# Altium PCB B220.PcbDoc
Units mm, origin at the board's own origin, x right, y up, seen from the top; angles counter-clockwise.
Board outline 40 x 22 mm, 4 copper layers (Top Copper, Signal Layer 1, Signal Layer 2, Bottom Copper), stack 1.57 mm thick; 17 components, 21 nets, 92 pads, 298 vias.
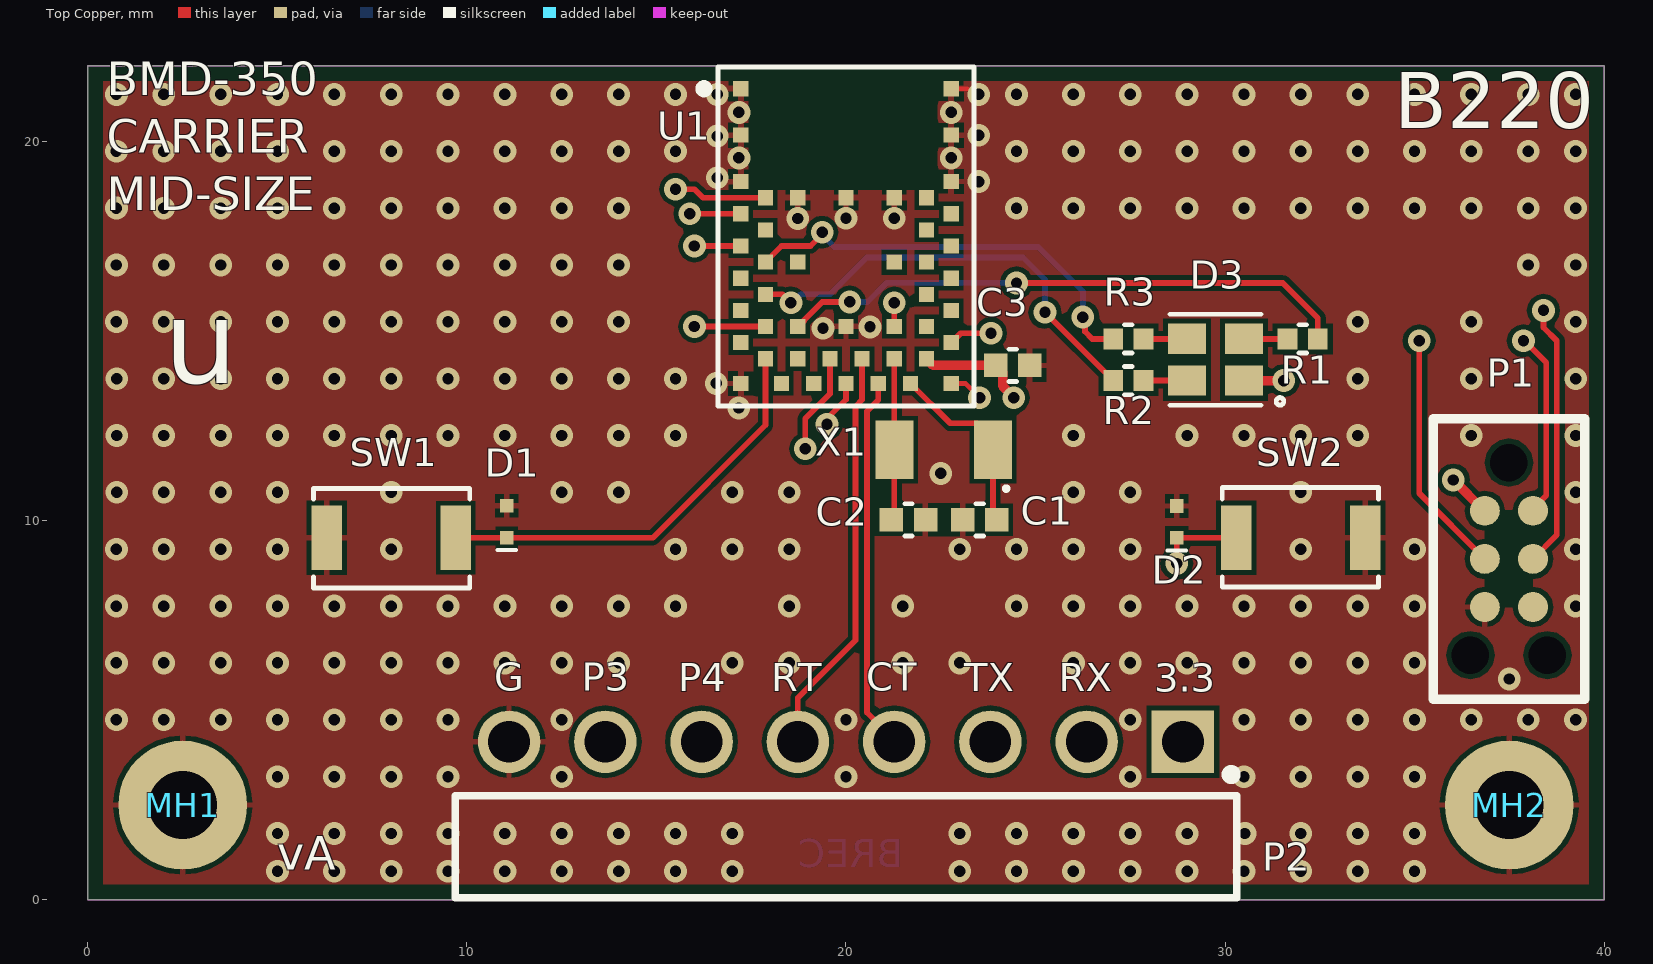
[diagram p0: Top Copper view]
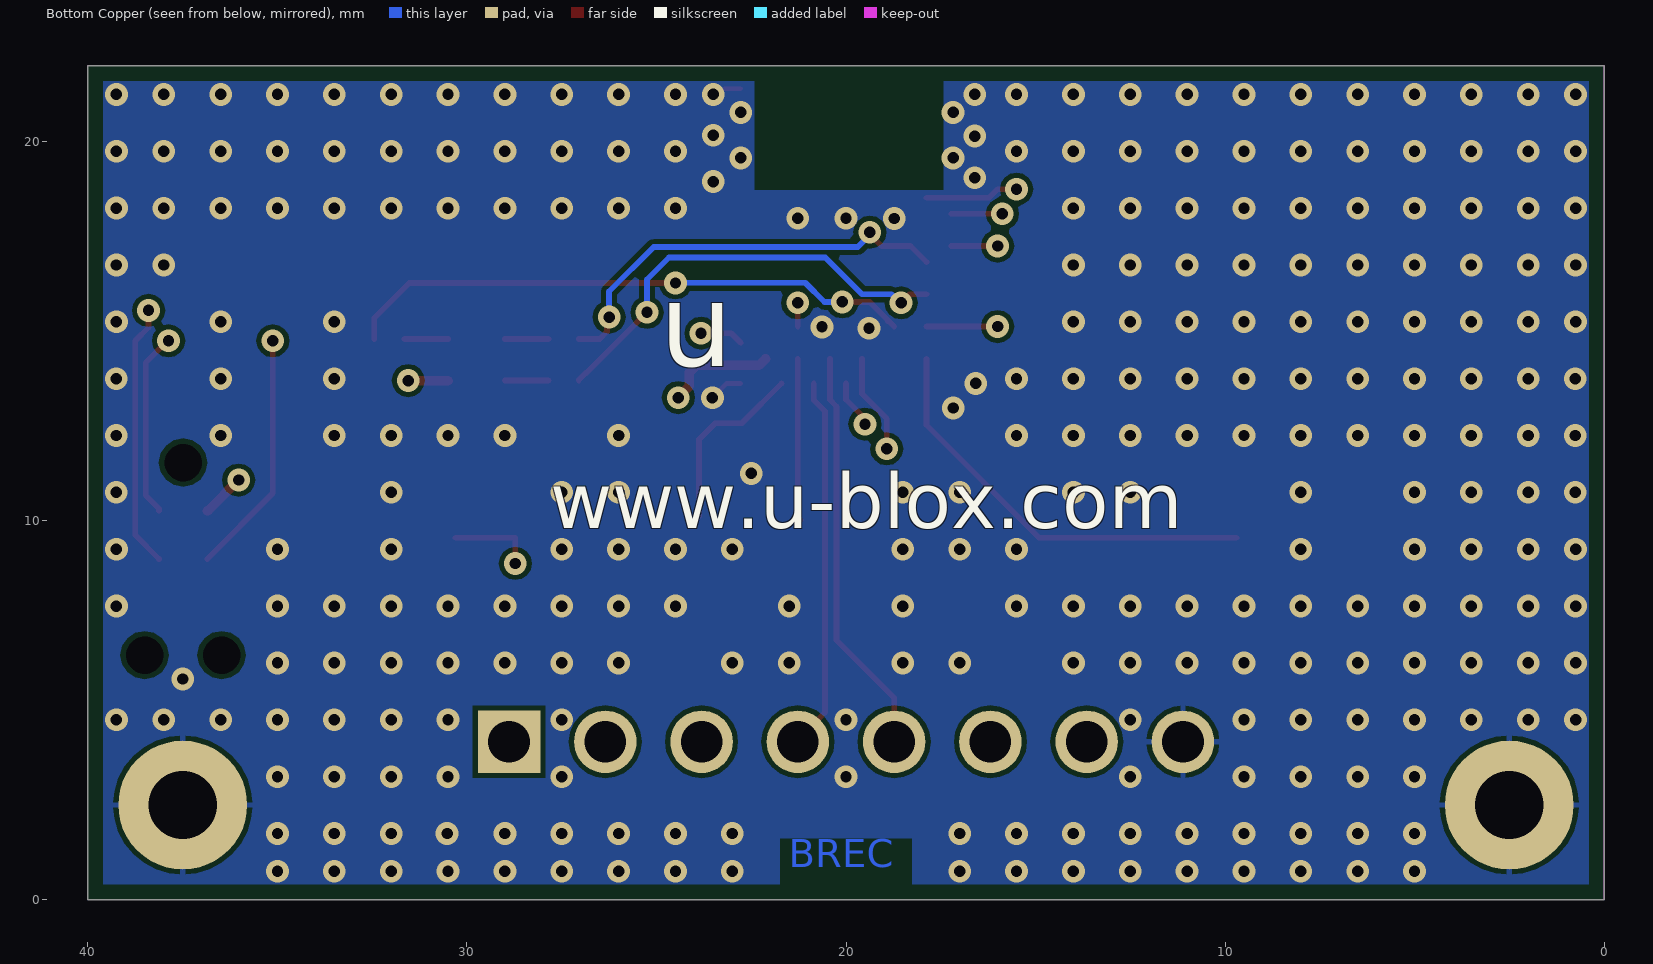
[diagram p1: Bottom Copper view, seen from below]
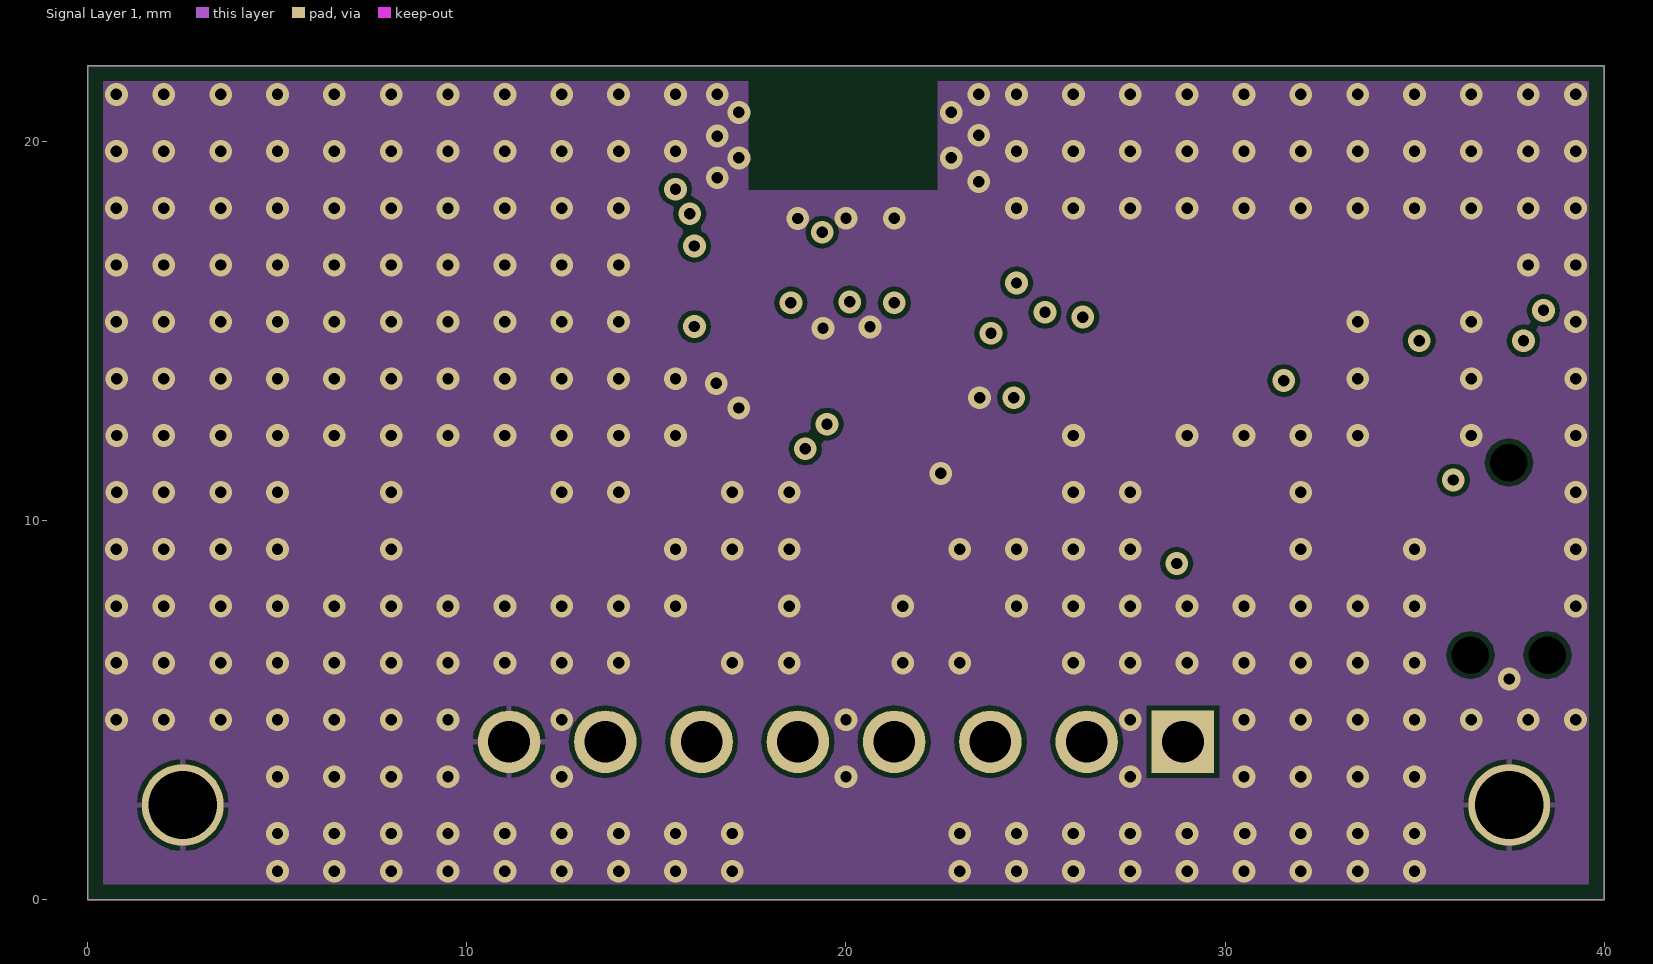
[diagram p2: Signal Layer 1]
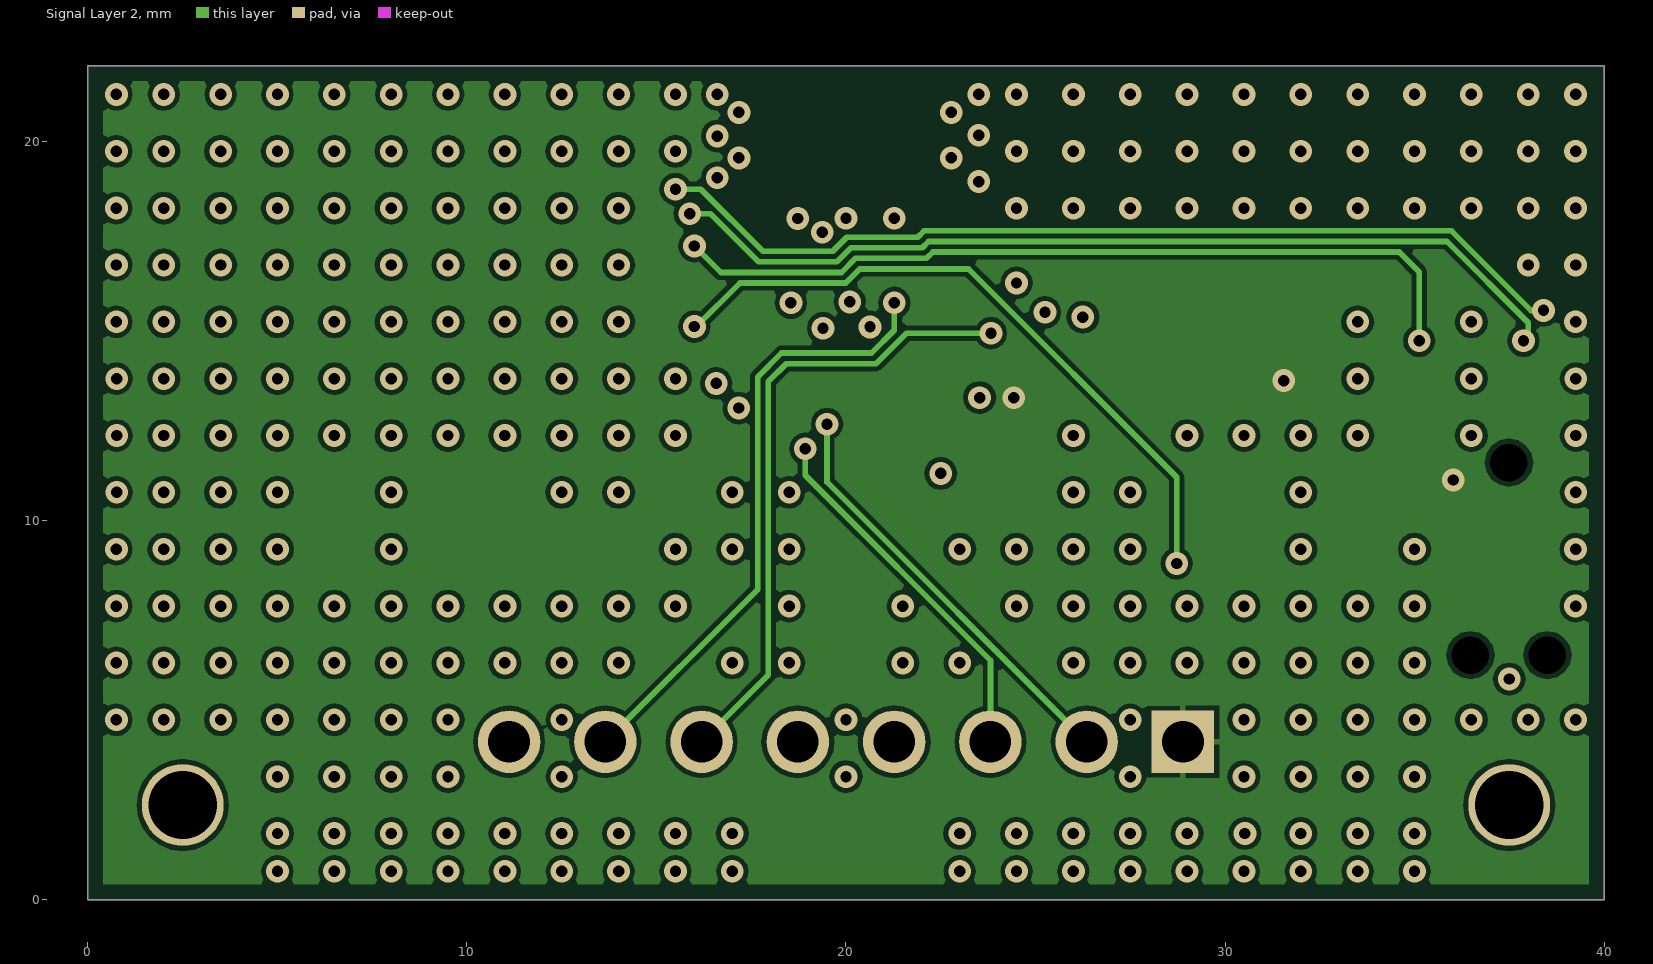
[diagram p3: Signal Layer 2]

## Layer stack, top to bottom
Top Mask: solder mask 0.015, Solder Resist, Dk 3.8
Top Copper: signal copper 0.035
Dielectric 1: prepreg 0.1, 2313, Dk 4.05
Signal Layer 1: signal copper 0.0175
Core: core 1.265, FR-4, Dk 4.5
Signal Layer 2: signal copper 0.0175
Dielectric 2: prepreg 0.1, 2313, Dk 4.05
Bottom Copper: signal copper 0.035
Bottom Mask: solder mask 0.015, Solder Resist, Dk 3.8

## Board outline
0,22 40,22 40,0 0,0

## Design rules (kind name [scope] priority, off if disabled: settings)
BoardOutlineClearance [All] p1: gap=0.4 ignorepadtopadclearanceinfootprint=FALSE
Clearance "Stitching GND" [IsStitchingVia and InNet('GND') vs (IsVia and (Not IsStitchingVia)) Or IsPad] p1: gap=0.127 ignorepadtopadclearanceinfootprint=TRUE
Clearance Clearance_Poly [InPolygon vs OnLayer('Keep-Out Layer') OR (OnLayer('Multi-Layer') AND IsPad  AND Not(PadIsPlated))] p2: gap=0.127 ignorepadtopadclearanceinfootprint=TRUE
Clearance [All] p3: gap=0.127 ignorepadtopadclearanceinfootprint=FALSE except(0: Arc-Text Arc-Hole Track-Text Track-Hole SMDPad-Text SMDPad-Hole THPad-Text THPad-Hole Via-Text Via-Hole Fill-Text Fill-Hole Poly-Text Poly-Hole Region-Text Region-Hole Text-Text Text-Hole)
ComponentClearance [All] p1: gap=0.127 collisioncheckmode=3 verticalgap=0.254 showdistances=FALSE
DiffPairsRouting .14 [All] p1: maxlimit=0.254 minlimit=0.1 mostfreqgap=0.254 toplayer_maxgap=0.1 toplayer_prefgap=0.1 toplayer_minwidth=0.1 toplayer_maxwidth=0.1 toplayer_prefwidth=0.1 midlayer1_mingap=0.254 midlayer1_minwidth=0.381 midlayer1_maxwidth=0.381 midlayer1_prefwidth=0.381 midlayer2_mingap=0.254 midlayer2_minwidth=0.381 midlayer2_maxwidth=0.381 midlayer2_prefwidth=0.381 bottomlayer_maxgap=0.1 bottomlayer_prefgap=0.1 bottomlayer_minwidth=0.1 bottomlayer_maxwidth=0.1 bottomlayer_prefwidth=0.1 maxuncoupledlength=12.7
Height [All] p1: minheight=0 maxheight=25.4 prefheight=2.54
HoleSize [All] p1: absolutevalues=TRUE maxlimit=2540 minlimit=0.127 maxpercent=80.000 minpercent=20.000
HoleToHoleClearance [All] p1: gap=0.152 allowstackedmicrovias=TRUE
MinimumSolderMaskSliver [All] p1: minsoldermaskwidth=0.025
PlaneClearance [InPoly] p1: clearance=0.254
PlaneConnect [All] p1: pad.planeconnectstyle=Relief pad.reliefexpansion=0.508 pad.reliefentries=4 pad.reliefconductorwidth=0.254 pad.reliefairgap=0.254 via.planeconnectstyle=Direct via.reliefexpansion=0.508 via.reliefentries=4 via.reliefconductorwidth=0.254 via.reliefairgap=0.254
PolygonConnect ThermalVias [IsVia] p1: connectstyle=Direct reliefconductorwidth=0.254 reliefentries=4 polygonreliefangle="90 Angle" airgapwidth=0.254
PolygonConnect "PolygonConnect - Power" [InNetClass('')] p2: connectstyle=Relief reliefconductorwidth=0.254 reliefentries=4 polygonreliefangle="90 Angle" airgapwidth=0.127
PolygonConnect PolygonConnect-BGA [InComponentClass('')] p3: connectstyle=Relief reliefconductorwidth=0.152 reliefentries=4 polygonreliefangle="45 Angle" airgapwidth=0.152
PolygonConnect PolygonConnect-General [All] p4: connectstyle=Relief reliefconductorwidth=0.152 reliefentries=4 polygonreliefangle="90 Angle" airgapwidth=0.127
RoutingLayers [All] p1: top layer_v5=TRUE mid layer 1_v5=FALSE mid layer 2_v5=TRUE bottom layer_v5=TRUE
RoutingVias [All] p1: holewidth=0.3 width=0.6 viastyle="Through Hole" minholewidth=0.2 minwidth=0.5 maxholewidth=7 maxwidth=1
SMDEntry [All] p1 off: side=TRUE corner=TRUE anyangle=TRUE
SilkToBoardRegionClearance [All] p1 off:
SilkToSilkClearance [All] p1 off: silktosilkclearance=0.025
SilkToSolderMaskClearance [IsPad] p1 off: minsilkscreentomaskgap=0 clearancetoexposedcopper=TRUE
SolderMaskExpansion SolderMaskExpansion_via [IsVia] p1: expansion=-0.254 istentingtop=TRUE
SolderMaskExpansion [All] p2: expansion=0.05 istentingtop=FALSE
UnRoutedNet [All] p1: checkbadconnections=TRUE
ViasUnderSMD [All] p1: allowed=FALSE
Width [All] p1: maxlimit=2.54 minlimit=0.127 preferedwidth=0.152 toplayer_maxwidth=0.254 toplayer_prefwidth=0.152 bottomlayer_maxwidth=0.254 bottomlayer_prefwidth=0.152 minimp=50.000000 maximp=50.000000 favimp=50.000000
Width Width_1 [All] p2: maxlimit=0.254 minlimit=0.254 preferedwidth=0.254
17 further rules are at their usual default settings.

## Components (designator, comment, footprint, x,y, rotation, side; value= is the part's Value field where it differs from the comment)
C1 "UBXH01-000411410P" "Cap 0402" 23.525,10.025 r180 top value=10P
C2 "UBXH01-000411410P" "Cap 0402" 21.65,10.025 r0 top value=10P
C3 "UBXH01-2021002100N" "Cap 0402" 24.4,14.1 r0 top value=100N
D1 "110-00019" SOD-923 11.05,9.975 r90 top
D2 "110-00019" SOD-923 28.725,9.97 r90 top
D3 "115-00011" 4-PLCC 29.75,14.25 r0 top
MH1 "MH_M1.5DNP" MH_M1.5 2.5,2.5 r0 top
MH2 "MH_M1.5DNP" MH_M1.5 37.5,2.5 r0 top
P1 "TC2030-IDC-NLDNP" TC2030-IDC-NL 37.49,11.535 r270 top
P2 "61300811021" 61300811021 20,1.4 r0 top
R1 "180-00031499R" "RES 0402 HD" 32.05,14.8 r180 top value=499R
R2 "180-00098220R" "RES 0402 HD" 27.45,13.7 r0 top value=220R
R3 "180-00098220R" "RES 0402 HD" 27.45,14.8 r0 top value=220R
SW1 "135-00007" B3U-1000P 8,9.55 r180 top
SW2 "135-00007" B3U-1000P 32,9.55 r0 top
U1 "=Value" BMD_LGA47S_865X640X150_CHIP 20,17.525 r0 top
X1 "100-00005" XTAL_3215 22.575,11.875 r180 top

## Footprints (in the part's own frame and the unit in brackets; to place one, negate y for a bottom-side part, rotate by r counter-clockwise, add the part's x,y. Pads: shape width x height; smd on the part's side, far side on the other; paste and mask are expansions set on the pad)
4-PLCC [mm] "4 Pin Plastic Leaded Chip Carrier, 2mm x 2mm"
  rect 1x0.8 smd: 1(0.75,-0.55) 2(-0.75,-0.55) 3(-0.75,0.55) 4(0.75,0.55)
  silkscreen extent -1.2,-1.2 1.8,1.2, body extent -1.05,-1.05 1.05,1.05, height 1.01
61300811021 [mm]
  rect 1.65x1.65 hole 1.1: 1(8.89,2.77)
  round 1.65 hole 1.1: 2(6.35,2.77) 3(3.81,2.77) 4(1.27,2.77) 5(-1.27,2.77) 6(-3.81,2.77) 7(-6.35,2.77) 8(-8.89,2.77)
  silkscreen extent -10.31,-1.35 10.31,2.03, body extent -10.16,-7.27 10.16,3.09, height 2.58
B3U-1000P [mm] "Button Tactile, SMT 4mm x 2.5mm, height 1.2mm"
  rect 0.8x1.7 smd: 1(-1.7,0) 2(1.7,0)
  silkscreen extent -2.07,-1.3 2.05,1.33, body extent -2,-1.25 2,1.25, height 1.6
BMD_LGA47S_865X640X150_CHIP [mm] "LGA, 47pin, 0.8mm Pitch, 8.65mm x 6.4mm"
  rect 0.4x0.4 smd: 1(-2.775,3.875) 2(-2.775,2.65) 3(-2.775,1.425) 4(-2.125,1) 5(-2.775,0.575) 6(-2.125,0.15) 7(-2.775,-0.275) 8(-2.125,-0.7) 9(-2.775,-1.125) 10(-2.125,-1.55) 11(-2.775,-1.975) 12(-2.125,-2.4) 13(-2.775,-2.825) 14(-2.125,-3.25) 15(-2.775,-3.9) 16(-1.7,-3.9) 17(-1.275,-3.25) 18(-0.85,-3.9) 19(-0.425,-3.25) 20(0,-3.9) 21(0.425,-3.25) 22(0.85,-3.9) 23(1.275,-3.25) 24(1.7,-3.9) 25(2.125,-3.25) 26(2.775,-3.9) 27(2.775,-2.825) 28(2.125,-2.4) 29(2.775,-1.975) 30(2.125,-1.55) 31(2.775,-1.125) 32(2.125,-0.7) 33(2.775,-0.275) 34(2.125,0.15) 35(2.775,0.575) 36(2.125,1) 37(2.775,1.425) 38(2.775,2.65) 39(2.775,3.875) 40(-1.275,1) 41(-1.275,-0.7) 42(-1.275,-2.4) 43(0,-2.4) 44(1.275,-2.4) 45(1.275,-0.7) 46(1.275,1) 47(0,1)
  Multi-Layer pour cut-out: -3.2,4.325 -3.2,4.075 -2.575,4.075 -2.575,1.2 2.425,1.2 2.425,4.075 3.2,4.075 3.2,4.325
  silkscreen extent -3.85,-4.5 3.37,4.45, body extent -3.2,-4.32 3.2,4.33, height 1.54
"Cap 0402" [mm] "Chip Capacitor, 2-Leads, Body 1.00x0.50mm, IPC Medium Density"
  rect 0.62x0.62 smd: 1(-0.45,0) 2(0.45,0)
  silkscreen extent -0.1,-0.43 0.1,0.43, body extent -0.55,-0.3 0.55,0.3, height 0.6
MH_M1.5 [mm] "Mounting Hole M1.5 Metric, 3.4mm diameter pad"
  round 3.4 / inner round 2.159 / far side round 3.4 hole 1.8: 1(0,0)
"RES 0402 HD" [mm] "Chip Resistor, 2-Leads, Body 1.05x0.54mm, IPC High Density"
  rect 0.52x0.55 smd: 1(-0.4,0) 2(0.4,0)
  silkscreen extent -0.1,-0.38 0.1,0.38, body extent -0.55,-0.3 0.55,0.3, height 0.4
SOD-923 [mm] "SOD-923, 2-Leads, Body 1.25x2.50mm, IPC High Density,"
  rect 0.36x0.35 smd mask+0.05: 1(-0.42,0) 2(0.42,0)
  silkscreen extent -0.75,-0.25 -0.75,0.25, body extent -0.4,-0.3 0.4,0.3, height 0.4
TC2030-IDC-NL [mm] "Tag-Connect 6-Pin No Legs"
  round 0.9 hole 0.995 unplated: 0(0,0) 0(5.08,-1.016) 0(5.08,1.016)
  round 0.79 smd paste-0.39: 1(1.27,-0.635) 2(1.27,0.635) 3(2.54,-0.635) 4(2.54,0.635) 5(3.81,-0.635) 6(3.81,0.635)
  silkscreen extent -1.16,-2 6.24,2
XTAL_3215 [mm] "XTAL, 2-Leads, Body 1.50x3.20mm"
  rect 1x1.55 smd: 1(-1.3,0) 2(1.3,0)
  silkscreen extent -1.7,0.98 -1.6,1.07, body extent -1.65,-0.8 1.65,0.8, height 0.9

## Part data
C1 C2: library part UBXH01-0004114, "CAP CER COG 0402", Manufacturer="Murata Manufacturing Company, Ltd.", Manufacturer 2=None, Manufacturer P/N=GRM1555C1H100CZ01, Max Voltage=25.0V, Tolerance=5%, Automotive=None, Critical=None, Editor=martin.frauchiger, Env=ROHS, Manufacturer 3=None, Manufacturer P/N 2=None, Manufacturer P/N 3=None, Max Current=None, Max Operating Temp=None, Max Power=None, Mfg P/N Datasheet=None, Mfg P/N Datasheet 2=None, Mfg P/N Datasheet 3=None, Mfg P/N Released=Yes, Mfg P/N Released 2=None, Mfg P/N Released 3=None, Mfg P/N Split=0, Mfg P/N Split 2=None, Mfg P/N Split 3=None, Mfg P/N Status=Obsolete, Mfg P/N Status 2=None, Mfg P/N Status 3=None, Min Operating Temp=None, Part Number=UBXH01-0004114, Part Type=Capacitor, Perferred=PREF, Permitted Use="Volume Products", RefDes=C, Release Data="2005-09-01 15:36:53", Released by=martin.frauchiger, Single Source=None, Size=0x0y, UBX Wiki=https://wiki.u-blox.com/bin/view/Operations/PartDetails?index=5225
C3: library part UBXH01-2021002, "CAP CER X5R 0402", Manufacturer="Samsung Electro-Mechanics", Manufacturer 2=None, Manufacturer P/N=CL05A104KP5NNN, Max Voltage=10.0V, Tolerance=10%, Automotive=None, Critical=None, Editor=roland.rust, Env=GREEN, Manufacturer 3=None, Manufacturer P/N 2=None, Manufacturer P/N 3=None, Max Current=None, Max Operating Temp=None, Max Power=None, Mfg P/N Datasheet=https://wiki.u-blox.com/bin/view/Generic/Docs/DocumentSummary?index=28113, Mfg P/N Datasheet 2=None, Mfg P/N Datasheet 3=None, Mfg P/N Released=Yes, Mfg P/N Released 2=None, Mfg P/N Released 3=None, Mfg P/N Split=0, Mfg P/N Split 2=None, Mfg P/N Split 3=None, Mfg P/N Status=Active, Mfg P/N Status 2=None, Mfg P/N Status 3=None, Min Operating Temp=None, Part Number=UBXH01-2021002, Part Type=Capacitor, Perferred=PREF, Permitted Use="Volume Products", RefDes=C, Release Data="2005-07-22 13:59:44", Released by=roland.rust, Single Source=None, Size=0x0y, UBX Wiki=https://wiki.u-blox.com/bin/view/Operations/PartDetails?index=5759
D1 D2: "Diode, ESD9B, 3.3V, ST5G, SOD-923", Manufacturer="ON Semiconductor", Manufacturer P/N=ESD9B3.3ST5G, MFG Package=SOD-923, Package Type=SOD, Part Name="Diode TVS 3.3V SOD-923", Voltage=3.3V, Arena Link=https://app.bom.com/a/4M5DJQ9Q9SR7DV4H?v=spec.summary, Body Size="0.8mm x 0.6mm", Component Mounting Type=SMT, Diode Type=TVS, Height=0.4mm, Item_Phase=Production, Part Number=110-00019, Part_Type=Diode, Pins=2, Revision=0A, Supplier 1=Arrow, Supplier Part Number 1=ESD9B3.3ST5G, Use in new designs=Yes
D3: "LED, RGB Diffused SMT, PLCC4 4 Pin", Color=RGB, Current="20mA Red, 10mA Green, 10mA, Blue", Manufacturer="Cree, Inc.", Manufacturer P/N=CLMVB-FKA-CFHEHLCBB7a363, MFG Package=PLCC4, Package Type=Custom, Part Name="LED RGB SMT 2mm x 2mm", Supplier Part Number 1=941-CLMVBFKACFHEHLCB, Voltage=5V, Arena Link=https://app.bom.com/a/UCV39GZGZIHY581D?v=spec.summary, Body Size="2.0mm x 2.0mm", Component Mounting Type=SMT, Height=1mm, Item_Phase=Production, Mounting Type=Vertical, Number of Circuits=3, Part Number=115-00011, Part_Type=LED, Pins=4, Revision=0A, Supplier 1=Mouser, Use in new designs=Yes, Vf="2V Red, 3V Green, 3V Blue"
MH1 MH2: library part MH_M1.5, "1.5M screw mounting hole, plated", Added By="Jeremy D", Added Date=7/9/2015, DNP=DNP, Height=0mm, Part Number=MH_M1.5, Size="3.4mm x 3.4mm", Type="Mounting Hole"
P1: library part TC2030-IDC-NL, "CON PADS FOR CBL PLUG-OF-NAILS 6-PIN NO LEGS", Manufacturer="TAG Connect", Added By="Paul B", Added Date=4/22/2015, DNP=DNP, Height=0, Manufacturer P/N=TC2030-IDC-NL, Part Number=TC2030-IDC-NL, Size="6.731mm x 12.446mm"
P2: library part CMP-1502-01075-1, "THT Angled Pin Header WR-PHD, Pitch 2.54 mm, Single Row, 8 pins", Contact Resistance=20mOhm, Manufacturer="Wurth Electronics", Operating Temperature=-40to105degC, Rated Current=3A, Withstanding Voltage=500VAC, Working Voltage=250VAC, Datasheet URL=https://katalog.we-online.de/em/datasheet/6130xx11021.pdf, Gender=Male, Manufacturer Part Number=61300811021, Manufacturer URL=http://www.we-online.de, Mounting Technology=THT, Orientation=Angled, Package Reference=61300811021, Packaging=Bag, Part Number=61300811021, Pin Number=8, Pitch=2.54mm, Publisher=WurthElektronik, Row Number=Single
R1: library part 180-00031, "Resistor, 499ohm, 1%, 1/16W, 0402", Manufacturer="Rohm Semiconductor", Manufacturer 2="Samsung Electro-Mechanics America, Inc", Manufacturer P/N=MCR01MRTF4990, Manufacturer P/N 2=RC1005F4990CS, Part Name="RES SMD 499 OHM 1% 1/16W 0402", Power=1/16W, Supplier Part Number 1=RHM499CDCT-ND, Tolerance="+/- 1%", Alternate Footprint Ref="RES 0402", Arena Link=https://app.bom.com/a/Q8RZ5CVCVEDU1SS5?v=spec.summary, Component Mounting Type=SMT, Height=0.4mm, Item_Phase=Production, Part Number=180-00031, Part_Type=Resistor, Pins=2, Revision=0D, Size=0402, Supplier 1=Digi-Key, Supplier 2=Digi-Key, Supplier Part Number 2=1276-3992-1-ND, Use in new designs=Yes
R2 R3: library part 180-00098, "Resistor, 220ohm, 5%, 1/16W, 0402.", Manufacturer="Panasonic Electronic Components", Manufacturer 2="Samsung Electro-Mechanics America, Inc", Manufacturer P/N=ERJ-2GEJ221X, Manufacturer P/N 2=RC1005J221CS, Part Name="RES SMD 220 OHM 5% 1/16W 0402", Power=1/16W, Supplier Part Number 1=P220JCT-ND, Tolerance="+/- 5%", Alternate Footprint Ref="RES 0402", Arena Link=https://app.bom.com/a/8Q9HNUDUDWVBJC30?v=spec.summary, Component Mounting Type=SMT, Height=0.4mm, Item_Phase=Production, Part Number=180-00098, Part_Type=Resistor, Pins=2, Revision=0C, Size=0402, Supplier 1=Digi-Key, Supplier 2=Digi-Key, Supplier Part Number 2=1276-4360-1-ND, Use in new designs=Yes
SW1 SW2: "Button, Momentary SPST-NO, 0.05A, 12V, 3mm x 2.5mm", Current=50mA, Manufacturer="Omron Electronics Inc-EMC Div", Manufacturer P/N=B3U-1000P, Part Name="SWITCH TACTILE SPST-NO 0.05A 12V", Supplier Part Number 1=SW1020CT-ND, Voltage=12VDC, Arena Link=https://app.bom.com/a/TBU28FYFYHGV5FQ0?v=spec.summary, Body Size="3mm x 2.5mm", Component Mounting Type=SMT, Height=1.2mm, Item_Phase=Production, Part Number=135-00007, Part_Type=Button, Pins=2, Revision=0A, Supplier 1=Digi-Key, Switch/Button Circuit=SPST, Switch/Button Function=Off-Mom, Use in new designs=Yes
U1: library part BMD-350_alt_symbol, "u-blox BMD-350 Bluetooth 5 module", Manufacturer=u-blox, Manufacturer P/N=BMD-350-A-R, Part Number=BMD-350, Body Size="8.65mm x 6.4mm", Height=1.5mm, Internal Antenna=CHIP, Protocol="BT 5 LE, 2.4GHz Proprietary"
X1: "XTAL, 2Pin, 32.768kHz, 7pF 20ppm", Frequency=32.768kHz, Frequency Tolerance=20ppm, Manufacturer=Epson, Manufacturer 2="AVX Corporation", Manufacturer P/N="FC-135 32.7680KA-AG3", Manufacturer P/N 2=ST3215SB32768C0HPWBB, MFG Package=2-SMD, Part Name="XTAL 32.768kHz 7pF 20ppm 3215", Supplier Part Number 1=SER4086CT-ND, Arena Link=https://app.bom.com/a/L3MU07Q7Q98O5PC8?v=spec.summary, Body Size="3.2mm x 1.5mm", CL=7pF, Component Mounting Type=SMT, Height=0.9mm, Item_Phase=Production, Part Number=100-00005, Part_Type=Crystal/Oscillator, Pins=2, Revision=0C, Supplier 1=Digi-Key, Supplier 2=Digi-Key, Supplier Part Number 2=1253-1113-1-ND, Use in new designs=Yes

## Via types
v1: diameter 0.6, hole 0.3, Top Copper to Bottom Copper, tented both sides, 298 vias

## Nets (pads, with @x,y where several pads share a name; then routed paths per layer and width w, separated by ;. In a path a pad name is that pad's centre, name@x,y a point inside that pad or via, vN(x,y) a via of type N, cw(c..) or ccw(c..) an arc to the next point about the centre after c; other vN are vias at no path point)
3V3: C3.1 D3.1 P1.1 P2.1 U1.25 | length 5.2
  Top Copper w0.254: U1.25 22.3,14.1 C3.1 24.133,13.917 24.133,13.561 24.425,13.269 v1(24.425,13.25) ; D3.1 v1(31.55,13.7) ; v1(36.025,11.075) 36.835,10.265 P1.1
BLUE: R2.1 U1.10 | length 11.6
  Top Copper w0.152: U1.10 18.323,15.975 v1(18.546,15.752) ; v1(25.25,15.5) 26.851,13.899 26.866,13.899 27.05,13.715 R2.1
  Bottom Copper w0.152: v1(18.546,15.752) 18.58,15.752 18.803,15.975 19.575,15.975 20.546,16.946 24.674,16.946 25.25,16.37 v1(25.25,15.5)
BUTTON_1: D1.1 SW1.1 U1.14 | length 11.2
  Top Copper w0.152: SW1.1 9.705,9.555 D1.1 14.905,9.555 17.875,12.525 U1.14
BUTTON_2: D2.1 SW2.1 U1.12 | length 22
  Top Copper w0.152: v1(16,15.125) U1.12 ; v1(28.725,8.875) D2.1 SW2.1
  Signal Layer 2 w0.152: v1(16,15.125) 16.05,15.125 17.2,16.275 19.995,16.275 20.366,16.646 23.229,16.646 28.725,11.15 v1(28.725,8.875)
CTS: P2.4 U1.22 | length 9.9
  Top Copper w0.152: U1.22 20.85,13.188 20.554,12.892 20.554,4.943 21.27,4.227 P2.4
GND: C1.2 C2.2 C3.2 D1.2 D2.2 MH1.1 MH2.1 P1.5 P2.8 SW1.2 SW2.2 U1.1 U1.2 U1.3 U1.15 U1.26 U1.37 U1.38 U1.39 U1.40 U1.43 U1.46 U1.47 | length 1.3
  Top Copper w0.127: U1.26 23.15,13.625 v1(23.525,13.25) ; U1.39 23.2,21.4
  other v1: 5,0.75 6.5,0.75 8,0.75 9.5,0.75 11,0.75 12.5,0.75 14,0.75 15.5,0.75 17,0.75 23,0.75 24.5,0.75 26,0.75 27.5,0.75 29,0.75 30.5,0.75 32,0.75 33.5,0.75 35,0.75 5,1.75 6.5,1.75 8,1.75 9.5,1.75 11,1.75 12.5,1.75 14,1.75 15.5,1.75 17,1.75 23,1.75 24.5,1.75 26,1.75 27.5,1.75 29,1.75 30.525,1.75 32,1.75 33.5,1.75 35,1.75 5,3.25 6.5,3.25 8,3.25 9.5,3.25 12.5,3.25 20,3.25 27.5,3.25 30.5,3.25 32,3.25 33.5,3.25 35,3.25 0.75,4.75 2,4.75 3.5,4.75 5,4.75 6.5,4.75 8,4.75 9.5,4.75 12.5,4.75 20,4.75 27.5,4.75 30.5,4.75 32,4.75 33.5,4.75 35,4.75 36.5,4.75 38,4.75 39.25,4.75 37.5,5.825 0.75,6.25 2,6.25 3.5,6.25 5,6.25 6.5,6.25 8,6.25 9.5,6.25 11,6.25 12.5,6.25 14,6.25 17,6.25 18.5,6.25 21.5,6.25 23,6.25 26,6.25 27.5,6.25 29,6.25 30.5,6.25 32,6.25 33.5,6.25 35,6.25 0.75,7.75 2,7.75 3.5,7.75 5,7.75 6.5,7.75 8,7.75 9.5,7.75 11,7.75 12.5,7.75 14,7.75 15.5,7.75 18.5,7.75 21.5,7.75 24.5,7.75 26,7.75 27.5,7.75 29,7.75 30.5,7.75 32,7.75 33.5,7.75 35,7.75 39.25,7.75 0.75,9.25 2,9.25 3.5,9.25 5,9.25 8,9.25 15.5,9.25 17,9.25 18.5,9.25 23,9.25 24.5,9.25 26,9.25 27.5,9.25 32,9.25 35,9.25 39.25,9.25 0.757,10.75 2,10.75 3.5,10.75 5,10.75 8,10.75 12.5,10.75 14,10.75 17,10.75 18.5,10.75 26,10.75 27.5,10.75 32,10.75 39.257,10.75 22.5,11.25 0.757,12.25 2,12.25 3.5,12.25 5,12.25 6.5,12.25 8,12.25 9.5,12.25 11,12.25 12.5,12.25 14,12.25 15.5,12.25 26,12.25 29,12.25 30.5,12.25 32,12.25 33.5,12.25 36.5,12.25 39.257,12.25 17.168,12.975 16.575,13.625 0.757,13.75 2,13.75 3.5,13.75 5,13.75 6.5,13.75 8,13.75 9.5,13.75 11,13.75 12.5,13.75 14,13.75 15.5,13.75 33.5,13.75 36.5,13.75 39.257,13.75 19.393,15.082 20.634,15.116 0.75,15.25 2,15.25 3.5,15.25 5,15.25 6.5,15.25 8,15.25 9.5,15.25 11,15.25 12.5,15.25 14,15.25 33.5,15.25 36.5,15.25 39.25,15.25 0.75,16.75 2,16.75 3.5,16.75 5,16.75 6.5,16.75 8,16.75 9.5,16.75 11,16.75 12.5,16.75 14,16.75 38,16.75 39.25,16.75 18.725,17.975 19.999,17.986 21.275,17.986 0.75,18.25 2,18.25 3.5,18.25 5,18.25 6.5,18.25 8,18.25 9.5,18.25 11,18.25 12.5,18.25 14,18.25 24.5,18.25 26,18.25 27.5,18.25 29,18.25 30.5,18.25 32,18.25 33.5,18.25 35,18.25 36.5,18.25 38,18.25 39.25,18.25 23.5,18.95 16.6,19.05 17.175,19.575 22.775,19.575 0.75,19.75 2,19.75 3.5,19.75 5,19.75 6.5,19.75 8,19.75 9.5,19.75 11,19.75 12.5,19.75 14,19.75 15.5,19.75 24.5,19.75 26,19.75 27.5,19.75 29,19.75 30.5,19.75 32,19.75 33.5,19.75 35,19.75 36.5,19.75 38,19.75 39.25,19.75 16.6,20.15 23.5,20.175 17.175,20.775 22.775,20.775 0.75,21.25 2,21.25 3.5,21.25 5,21.25 6.5,21.25 8,21.25 9.5,21.25 11,21.25 12.5,21.25 14,21.25 15.5,21.25 16.6,21.25 23.5,21.25 24.5,21.25 26,21.25 27.5,21.25 29,21.25 30.5,21.25 32,21.25 33.5,21.25 35,21.25 36.5,21.25 38,21.25 39.25,21.25
GREEN: R3.1 U1.8 | length 11.3
  Top Copper w0.152: U1.8 18.3,17.25 19.062,17.25 19.371,17.559 v1(19.371,17.615) ; v1(26.25,15.375) 26.309,15.316 26.309,14.991 26.5,14.8 R3.1
  Bottom Copper w0.152: v1(19.371,17.615) 19.377,17.609 19.377,17.536 19.688,17.225 25.075,17.225 26.25,16.05 v1(26.25,15.375)
LFCLK1: C2.1 U1.23 X1.2 | length 4.3
  Top Copper w0.152: C2.1 21.275,10.1 X1.2 U1.23
LFCLK2: C1.1 U1.24 X1.1 | length 5
  Top Copper w0.152: U1.24 22.751,12.574 23.451,12.574 23.875,12.15 X1.1 23.875,10.125 C1.1
NetD3_2: D3.2 R2.2 | length 1.1
  Top Copper w0.152: R2.2 D3.2
NetD3_3: D3.3 R3.2 | length 1.1
  Top Copper w0.152: R3.2 D3.3
NetD3_4: D3.4 R1.2 | length 1.2
  Top Copper w0.152: D3.4 R1.2
nRESET: P1.3 U1.7 | length 29.4
  Top Copper w0.152: v1(16,17.25) U1.7 ; v1(35.125,14.75) 35.125,10.725 P1.3
  Signal Layer 2 w0.152: v1(16,17.25) 16.7,16.55 17.08,16.55 17.084,16.554 19.879,16.554 20.25,16.925 22.125,16.925 22.292,17.092 34.6,17.092 35.125,16.567 v1(35.125,14.75)
P0.03: P2.7 U1.44 | length 16.8
  Top Copper w0.152: U1.44 v1(21.275,15.75)
  Signal Layer 2 w0.152: P2.7 17.671,8.191 17.671,13.796 18.3,14.425 20.675,14.425 21.275,15.025 v1(21.275,15.75)
P0.04: P2.6 U1.27 | length 17.8
  Top Copper w0.152: U1.27 23.025,14.95 v1(23.825,14.95)
  Signal Layer 2 w0.152: P2.6 17.95,5.93 17.95,13.675 18.421,14.146 20.791,14.146 21.595,14.95 v1(23.825,14.95)
RED: R1.1 U1.42 | length 15.1
  Top Copper w0.152: U1.42 18.872,15.272 18.89,15.272 18.89,15.29 19.375,15.775 v1(20.1,15.775) ; v1(24.5,16.275) 31.525,16.275 32.45,15.35 R1.1
  Bottom Copper w0.152: v1(20.1,15.775) 20.568,15.775 21.075,16.282 v1@24.5,16.282
RTS: P2.5 U1.21 | length 10.8
  Top Copper w0.152: P2.5 18.73,5.33 20.25,6.85 20.25,13.017 20.425,13.192 U1.21
RXD: P2.2 U1.20 | length 12.5
  Top Copper w0.152: v1(19.5,12.55) 19.5,12.697 20,13.197 U1.20
  Signal Layer 2 w0.152: v1(19.5,12.55) 19.5,11.02 P2.2
SWCLK: P1.4 U1.4 | length 34.1
  Top Copper w0.152: v1(15.5,18.75) 16,18.75 16.225,18.525 U1.4 ; P1.4 38.754,9.624 38.754,14.75 38.402,15.102 v1(38.402,15.551)
  Signal Layer 2 w0.152: v1(15.5,18.75) 16.17,18.75 17.808,17.112 19.648,17.112 20.019,17.483 21.894,17.483 22.061,17.65 35.975,17.65 38.074,15.551 v1(38.402,15.551)
SWDIO: P1.2 U1.5 | length 30.6
  Top Copper w0.152: v1(15.875,18.1) U1.5 ; v1(37.875,14.75) 37.9,14.75 38.475,14.175 38.475,10.67 38.125,10.32 P1.2
  Signal Layer 2 w0.152: v1(15.875,18.1) 16.425,18.1 17.692,16.833 19.763,16.833 20.134,17.204 22.009,17.204 22.176,17.371 35.859,17.371 38.003,15.228 38.003,14.753 38,14.75 v1(37.875,14.75)
TXD: P2.3 U1.19 | length 12.4
  Top Copper w0.152: v1(18.925,11.9) 18.925,12.7 19.575,13.35 U1.19
  Signal Layer 2 w0.152: v1(18.925,11.9) 18.925,11.2 23.81,6.315 P2.3
pads on no net: P1.0 P1.6 U1.6 U1.9 U1.11 U1.13 U1.16 U1.17 U1.18 U1.28 U1.29 U1.30 U1.31 U1.32 U1.33 U1.34 U1.35 U1.36 U1.41 U1.45

## Polygon pours and split planes (outlines as drawn)
GND on Top Copper "GND_L01_P009" (solid, remove dead copper, pour order 9): 39.999,22 -0.001,22 -0.001,0 39.999,0
GND on Bottom Copper "GND_L04_P010" (solid, remove dead copper, pour order 10): 40,22 0,22 0,0 40,0
GND on Signal Layer 1 "NONET_L-01_P-001" (solid, remove dead copper, pour order 11): 0,22 40,22 40,0 0,0
3V3 on Signal Layer 2 "NONET_L-01_P-001" (solid, remove dead copper, pour order 14): 0,22 40,22 40,0 0,0

## Keep-outs
Keep-Out Layer:
  the board outline again, w0.025

## Other copper
Top Copper:
  pour cut-out: 0,21.6 0,22 40,22 40,21.6 22.425,21.6 22.425,18.725 17.425,18.725 17.425,21.6
  pour cut-out: 37.225,10.275 37.75,10.275 38.125,9.9 38.125,8.075 37.775,7.725 37.2,7.725 36.855,8.07 36.855,9.905 36.925,9.975
Signal Layer 1:
  pour cut-out: 0,21.6 0,22 40,22 40,21.6 22.425,21.6 22.425,18.725 17.425,18.725 17.425,21.6
Signal Layer 2:
  pour cut-out: 0,21.6 0,22 40,22 40,21.6 22.425,21.6 22.425,18.725 17.425,18.725 17.425,21.6
Bottom Copper:
  pour cut-out: 0,21.6 0,22 40,22 40,21.6 22.425,21.6 22.425,18.725 17.425,18.725 17.425,21.6
  pour cut-out: 18.25,0.4 18.25,1.625 21.75,1.625 21.75,0.4
  text "BREC" at 21.512,0.614 h1.27

## Silkscreen, mask and mechanical layers (free items; w line width, h text height)
Top Overlay:
  text "B220" at 34.467,19.867 h2.54
  text "BMD-350 / CARRIER / MID-SIZE" at 0.5,17.9 h1.52
  text "u" at 2.014,12.904 h3.81
  text "G" at 10.724,5.264 h1.27
  text "P3" at 13.026,5.264 h1.27
  text "CT" at 20.534,5.264 h1.27
  text "P4" at 15.577,5.25 h1.27
  text "RT" at 18.025,5.25 h1.27
  text "TX" at 23.117,5.25 h1.27
  text "RX" at 25.611,5.25 h1.27
  text "3.3" at 28.136,5.239 h1.27
  text "vA" at 5,0.5 h1.52
Bottom Overlay:
  text "u" at 24.911,13.348 h3.81
  text "www.u-blox.com" at 27.806,9.309 h2.5
Route Tool Path:
  the board outline again, w0.127